# Allegro board i8080.brd
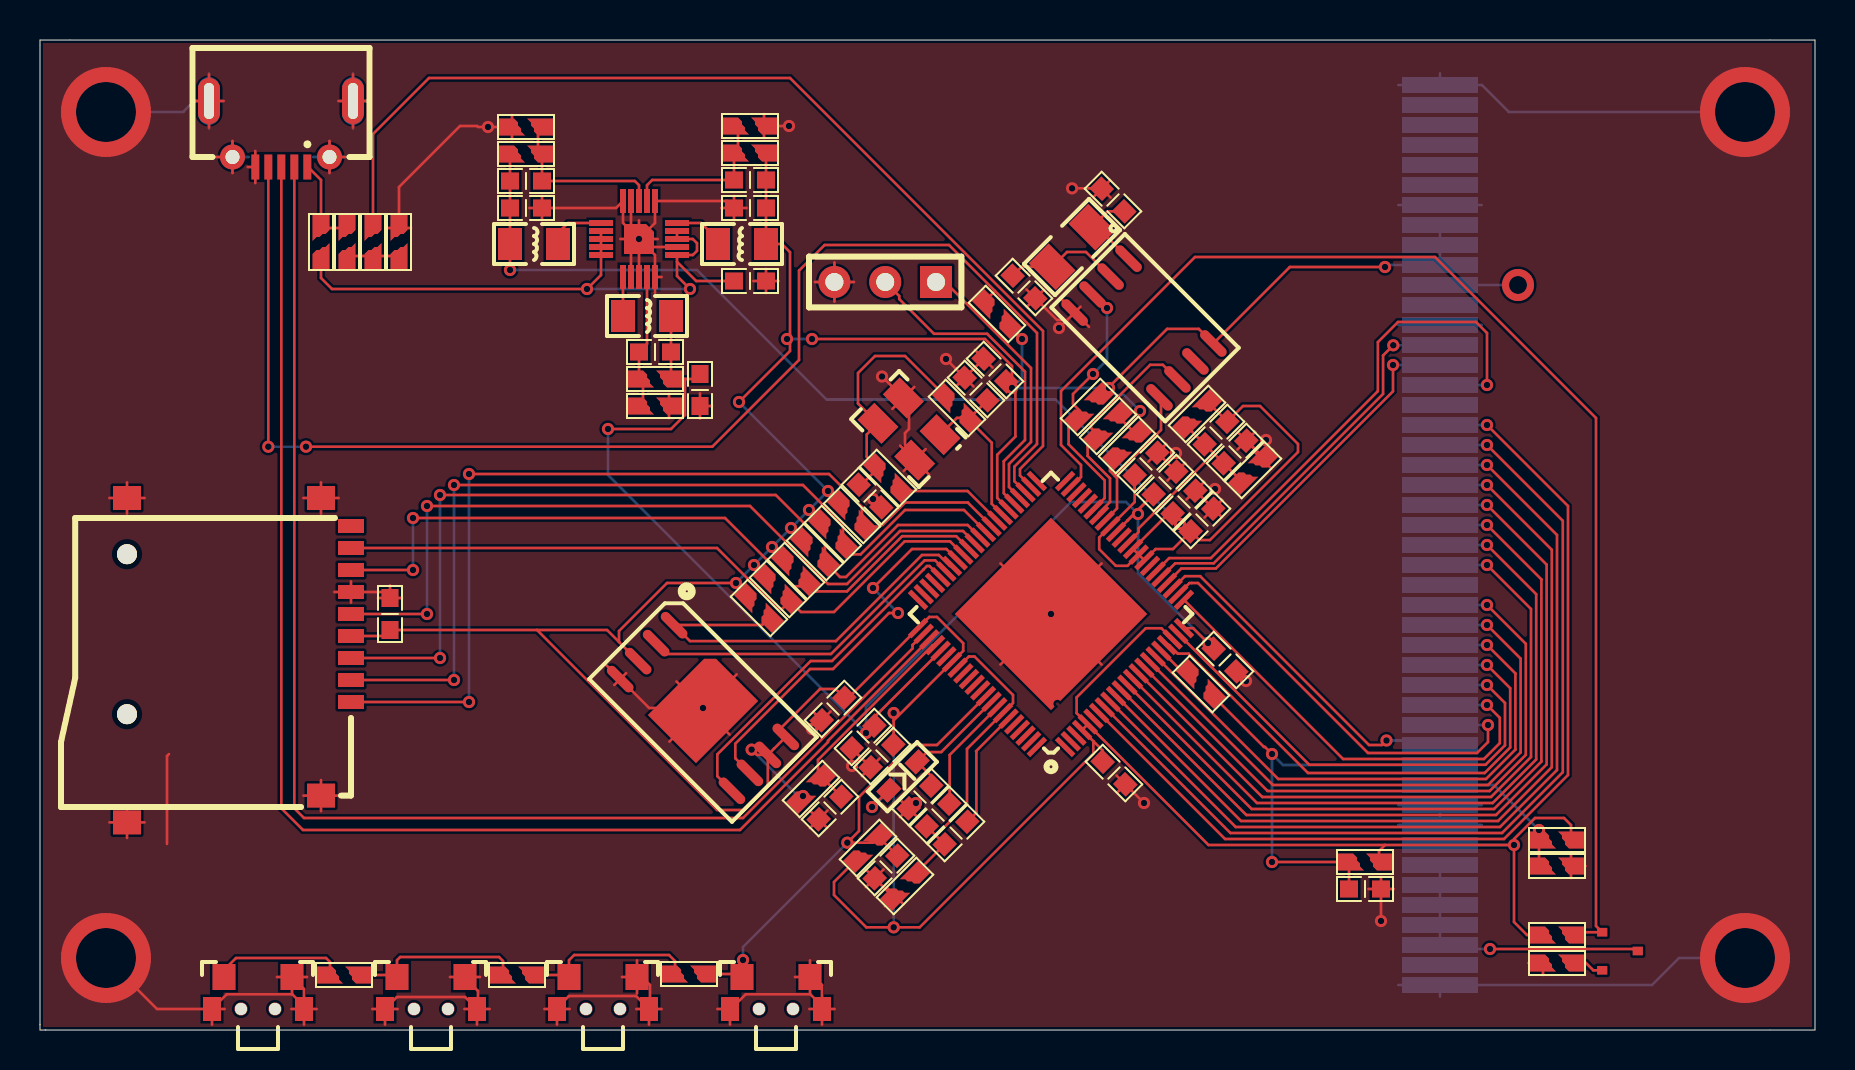
[diagram p0: board, top side]
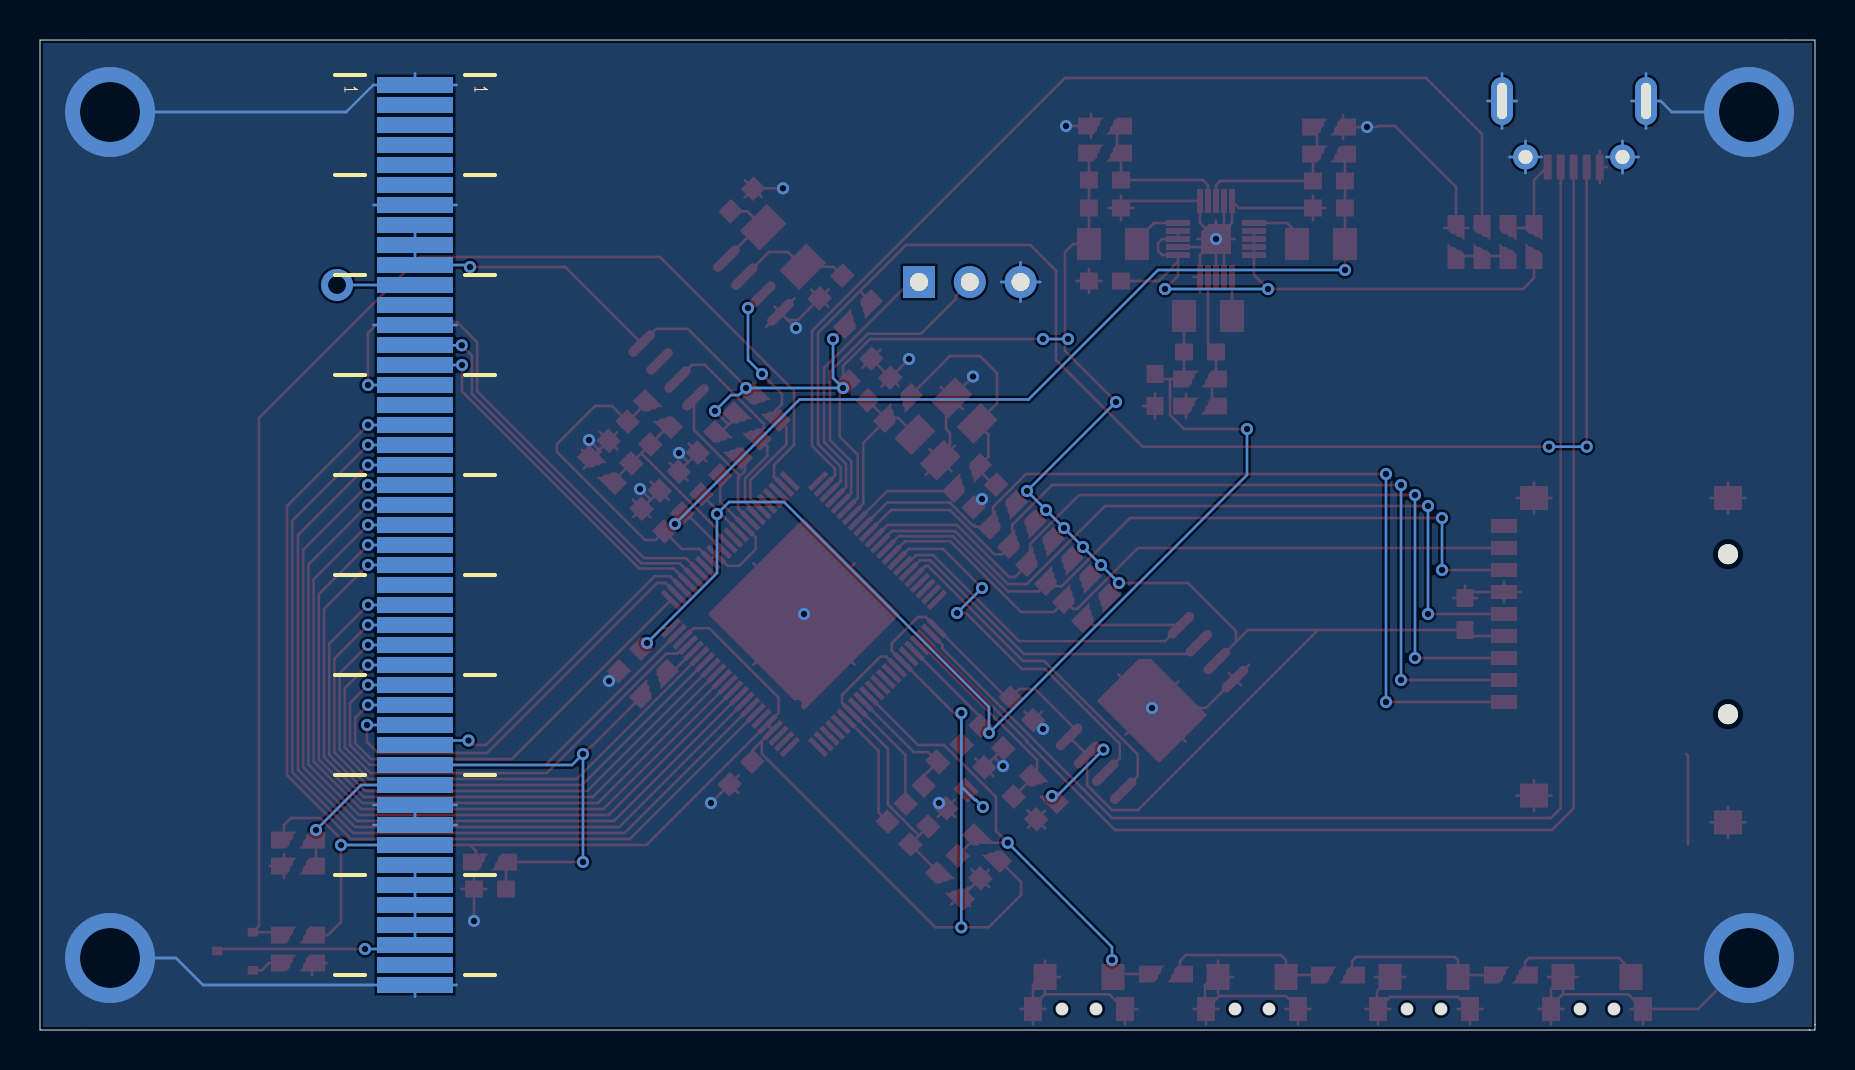
[diagram p1: board, bottom side, seen from below]

Outline 88.75 x 49.5 mm; copper layers: TOP, BOTTOM. Coordinates in mm from the lower left corner of the outline.
Outline path: 0,0.25 0,49.5 88.75,49.5 88.75,0 0.25,0 ; 0,0.3 0,0 0.3,0

## Design rules (mm)
constraint set DEFAULT: min track width 0.13

## Placement (name value [footprint] x y rotation side)
C1  33pF  [CAP0603]  46.8 32.05 315 top
C2  33pF  [CAP0603]  41.5 26.7 135 top
C3  1uF  [CAP0603]  39.5 11.1 225 top
C4  12pF  [CAP0603]  53.65 41.5 315 top
C5  12pF  [CAP0603]  49.2 37.15 135 top
C6  104  [CAP0603]  42.3 8.15 225 top
C7  0.1uF  [CAP0603]  17.5 20.8 90 top
C8  220pF  [CAP0603]  35.5 42.5 0 top
C9  10uF  [CAP0603]  35.5 41.1 0 top
C10  220pF  [CAP0603]  30.75 33.9 180 top
C11  1uF  [CAP0603]  24.3 42.45 0 top
C12  10uF  [CAP0603]  24.3 41.1 0 top
C13  10uF  [CAP0603]  33 32 90 top
C14  0.1uF  [CAP0603]  57.2 26.4 45 top
C15  0.1uF  [CAP0603]  55.3 28.3 45 top
C16  0.1uF  [CAP0603]  58.1 25.5 45 top
C19  0.1uF  [CAP0603]  59.25 18.5 315 top
C20  0.1uF  [CAP0603]  41.15 14.65 225 top
C21  0.1uF  [CAP0603]  56.25 27.35 45 top
C22  0.1uF  [CAP0603]  42.1 13.7 225 top
C23  0.1uF  [CAP0603]  47.75 33 135 top
C24  0.1uF  [CAP0603]  53.7 12.85 315 top
C25  1uF  [CAP0603]  35.5 37.45 180 top
C27  0.1uF  [CAP0603]  39.65 16.05 225 top
C29  0.1uF  [CAP0603]  58.8 29.85 225 top
C30  1uF  [CAP0603]  44.9 10.75 225 top
C31  1uF  [CAP0603]  45.8 9.85 225 top
C32  0.1uF  [CAP0603]  44 11.65 225 top
C33  0.1uF  [CAP0603]  59.75 28.9 45 top
C35  1uF  [CAP0603]  66.25 7.05 0 top
D1  1N4148  [1N4148-SOD323]  43.15 12.7 225 top
J3  -  [TFT8K3548FPC-A1-E]  70 24.75 0 bottom
J4  USB  [MICROUSB]  12.05 43.65 0 top
J5  Debug  [HEADER1X3_2_54]  44.8 37.4 270 top
J6  -  [TF-SOCKET]  15.55 16.4 270 top
L1  1.5uH  [MLF2012]  35.1 39.3 180 top
L2  1.5uH  [MLF2012]  30.35 35.7 0 top
L3  1.5uH  [MLF2012]  24.7 39.3 0 top
NOREF  -  []  0 0 90 top
NOREF#2  -  []  0 49.5 0 top
NOREF#3  -  []  82 49.5 0 top
NOREF#4  -  []  0 0 0 top
Q1  GP2302  [SOT23]  79 3.95 0 top
R1  1M  [RES0603]  45.85 31.1 135 top
R2  0R  [RES0603]  42.4 27.6 135 top
R3  10K  [RES0603]  38.55 12.05 225 top
R4  10K/DNP  [RES0603]  75.85 9.5 180 top
R5  10K  [RES0603]  75.85 8.2 0 top
R6  10K  [RES0603]  75.85 4.75 180 top
R7  22R  [RES0603]  75.85 3.35 0 top
R8  0R  [RES0603]  14.05 39.4 270 top
R9  10K  [RES0603]  47.85 35.8 315 top
R10  10K  [RES0603]  16.65 39.4 90 top
R11  10K  [RES0603]  15.35 39.4 270 top
R12  22K  [RES0603]  17.95 39.4 90 top
R13  10K  [RES0603]  35.95 21.1 135 top
R14  10K  [RES0603]  53.4 30.2 45 top
R15  10K  [RES0603]  54.35 29.25 45 top
R16  100K  [RES0603]  41.4 9.1 45 top
R17  10K  [RES0603]  52.45 31.15 45 top
R18  10K  [RES0603]  32.45 2.8 180 top
R19  10K  [RES0603]  23.85 2.75 180 top
R20  10K  [RES0603]  15.2 2.75 180 top
R21  47K  [RES0603]  40.6 25.75 315 top
R22  47K  [RES0603]  39.65 24.8 315 top
R23  47K  [RES0603]  38.75 23.9 315 top
R24  47K  [RES0603]  37.8 22.95 315 top
R25  47K  [RES0603]  36.9 22.05 315 top
R26  550K  [RES0603]  35.5 43.85 0 top
R27  110K  [RES0603]  35.5 45.2 0 top
R28  47K  [RES0603]  24.3 45.15 180 top
R29  100K  [RES0603]  30.75 31.2 180 top
R30  100K  [RES0603]  30.75 32.55 180 top
R31  152K  [RES0603]  24.3 43.8 0 top
R32  2K  [RES0603]  57.85 30.8 45 top
R35  2K  [RES0603]  60.65 28 225 top
R36  0R  [RES0603]  43.25 7.2 45 top
R37  10K  [RES0603]  66.25 8.4 180 top
R38  0R  [RES0603]  58.05 17.3 135 top
SW2  TS_018-4.55x3.5x1.8  [TS_018-4P55X3P5X1P8]  36.8 1.05 270 top
SW3  TS_018-4.55x3.5x1.8  [TS_018-4P55X3P5X1P8]  28.15 1.05 270 top
SW4  TS_018-4.55x3.5x1.8  [TS_018-4P55X3P5X1P8]  19.55 1.05 270 top
SW5  TS_018-4.55x3.5x1.8  [TS_018-4P55X3P5X1P8]  10.9 1.05 270 top
U1  F1C100S  [F1C100S-MQFN]  50.55 20.8 135 top
U2  GD5FxG4UAYIG  [GD5F1GQ4X_W25QXX_SOP8_208MIL]  33.15 16.1 315 top
U3  PCF8563  [PCF8563-SO8-3]  55.2 35.1 315 top
U4  EA3036  [EA3036-QFN20]  29.95 39.55 270 top
Y1  YSX321SL  [YSX321SL-3_2X2_5X0_8]  43.45 30.05 135 top
Y2  32.768KHz  [CRYSTAL-3215]  51.6 39.15 45 top

## Library data of the parts
C1-C16 C19-C25 C27 C29-C33 C35 = CAPACITOR NON-POL
D1 = DIODE
J3 = TFT8K3548FPC_A1_E
J4 = MICROUSB
J5 = HEADER 3
J6 = TF-SOCKET
L1-L3 = INDUCTOR/SM
Q1 = GP2302
R1-R3 R6 R7 R9 R13-R32 R35-R37 = RESISTOR/SM
R4 R5 R8 R10-R12 R38 = RESISTOR
SW2-SW5 = TS_018-4.55x3.5x1.8
U1 = F1C100S
U2 = GD5FxG4UAYIG
U3 = PCF8563-SOP8
U4 = ea3036
Y1 = YSX321SL
Y2 = CRYSTAL/SM

## Footprints (pads in the part's own frame, mm; a bottom-side part is the same pattern mirrored in y, then rotated)
1N4148-SOD323
  custom 1x0.8 smd: 1(-1,0) 2(1,0)
CAP0603
  custom 0.9x0.85 smd: 1(-0.8,0) 2(0.8,0)
CRYSTAL-3215
  custom 1.4x1.9 smd: 1(-1.4,0) 2(1.4,0)
EA3036-QFN20
  custom 1.2x0.3 smd: 1(-1.9,0.8) 2(-1.9,0.4) 3(-1.9,0) 4(-1.9,-0.4) 5(-1.9,-0.8) 11(1.9,-0.8) 12(1.9,-0.4) 13(1.9,0) 14(1.9,0.4) 15(1.9,0.8)
  custom 0.3x1.2 smd: 6(-0.8,-1.9) 7(-0.4,-1.9) 8(0,-1.9) 9(0.4,-1.9) 10(0.8,-1.9) 16(0.8,1.9) 17(0.4,1.9) 18(0,1.9) 19(-0.4,1.9) 20(-0.8,1.9)
  custom 1.5x1.5 smd: 21(0,0)
F1C100S-MQFN
  custom 1.2x0.25 smd: 1(-5.2,4.2) 2(-5.2,3.8) 3(-5.2,3.4) 4(-5.2,3) 5(-5.2,2.6) 6(-5.2,2.2) 7(-5.2,1.8) 8(-5.2,1.4) 9(-5.2,1) 10(-5.2,0.6) 11(-5.2,0.2) 12(-5.2,-0.2) 13(-5.2,-0.6) 14(-5.2,-1) 15(-5.2,-1.4) 16(-5.2,-1.8) 17(-5.2,-2.2) 18(-5.2,-2.6) 19(-5.2,-3) 20(-5.2,-3.4) 21(-5.2,-3.8) 22(-5.2,-4.2) 45(5.2,-4.2) 46(5.2,-3.8) 47(5.2,-3.4) 48(5.2,-3) 49(5.2,-2.6) 50(5.2,-2.2) 51(5.2,-1.8) 52(5.2,-1.4) 53(5.2,-1) 54(5.2,-0.6) 55(5.2,-0.2) 56(5.2,0.2) 57(5.2,0.6) 58(5.2,1) 59(5.2,1.4) 60(5.2,1.8) 61(5.2,2.2) 62(5.2,2.6) 63(5.2,3) 64(5.2,3.4) 65(5.2,3.8) 66(5.2,4.2)
  custom 0.25x1.2 smd: 23(-4.2,-5.2) 24(-3.8,-5.2) 25(-3.4,-5.2) 26(-3,-5.2) 27(-2.6,-5.2) 28(-2.2,-5.2) 29(-1.8,-5.2) 30(-1.4,-5.2) 31(-1,-5.2) 32(-0.6,-5.2) 33(-0.2,-5.2) 34(0.2,-5.2) 35(0.6,-5.2) 36(1,-5.2) 37(1.4,-5.2) 38(1.8,-5.2) 39(2.2,-5.2) 40(2.6,-5.2) 41(3,-5.2) 42(3.4,-5.2) 43(3.8,-5.2) 44(4.2,-5.2) 67(4.2,5.2) 68(3.8,5.2) 69(3.4,5.2) 70(3,5.2) 71(2.6,5.2) 72(2.2,5.2) 73(1.8,5.2) 74(1.4,5.2) 75(1,5.2) 76(0.6,5.2) 77(0.2,5.2) 78(-0.2,5.2) 79(-0.6,5.2) 80(-1,5.2) 81(-1.4,5.2) 82(-1.8,5.2) 83(-2.2,5.2) 84(-2.6,5.2) 85(-3,5.2) 86(-3.4,5.2) 87(-3.8,5.2) 88(-4.2,5.2)
  custom 6.8x6.8 smd: 89(0,0)
GD5F1GQ4X_W25QXX_SOP8_208MIL
  custom 1.68x0.48 smd: 1(-3.95,1.905) 2(-3.95,0.635) 3(-3.95,-0.635) 4(-3.95,-1.905) 5(3.95,-1.905) 6(3.95,-0.635) 7(3.95,0.635) 8(3.95,1.905)
  custom 3.4x4.4 smd: 9(0,0)
HEADER1X3_2_54
  rect 1.6x1.6 hole 0.9: 1(0,0)
  round 1.6 hole 0.9: 2(0,-2.54) 3(0,-5.08)
MICROUSB
  rect 0.4x1.25 smd: 1(1.315,-0.5) 2(0.665,-0.5) 3(0.015,-0.5) 4(-0.635,-0.5) 5(-1.285,-0.5)
  round 1.25 hole 0.7: 6(-2.425,0) 7(2.425,0)
  oval 1.1x2.3 hole 0.5x1.8: 8(-3.6,2.8) 9(3.6,2.8)
MLF2012
  custom 1.2x1.6 smd: 1(-1.2,0) 2(1.2,0)
PCF8563-SO8-3
  custom 1.68x0.48 smd: 1(-3,1.905) 2(-3,0.635) 3(-3,-0.635) 4(-3,-1.905) 5(3,-1.905) 6(3,-0.635) 7(3,0.635) 8(3,1.905)
RES0603
  custom 1.3x0.85 smd: 1(-0.7,0) 2(0.7,0)
SOT23
  rect 0.508x0.432 smd: 1(-0.889,0.94) 2(-0.889,-0.965) 3(0.889,0)
TF-SOCKET
  round 1 hole 1.1 unplated: (-7.39,-11.2) (0.61,-11.2)
  rect 0.7x1.3 smd: 1(0,0) 2(-1.1,0) 3(-2.2,0) 4(-3.3,0) 5(-4.4,0) 6(-5.5,0) 7(-6.6,0) 8(-7.7,0) 9(-8.8,0)
  rect 1.2x1.4 smd: 10(-10.2,-1.5) 11(4.68,-1.5) 12(-10.2,-11.2) 13(6.02,-11.2)
TFT8K3548FPC-A1-E
  custom 3.8x0.8 smd: 1(0,-22.5) 2(0,-21.5) 3(0,-20.5) 4(0,-19.5) 5(0,-18.5) 6(0,-17.5) 7(0,-16.5) 8(0,-15.5) 9(0,-14.5) 10(0,-13.5) 11(0,-12.5) 12(0,-11.5) 13(0,-10.5) 14(0,-9.5) 15(0,-8.5) 16(0,-7.5) 17(0,-6.5) 18(0,-5.5) 19(0,-4.5) 20(0,-3.5) 21(0,-2.5) 22(0,-1.5) 23(0,-0.5) 24(0,0.5) 25(0,1.5) 26(0,2.5) 27(0,3.5) 28(0,4.5) 29(0,5.5) 30(0,6.5) 31(0,7.5) 32(0,8.5) 33(0,9.5) 34(0,10.5) 35(0,11.5) 36(0,12.5) 37(0,13.5) 38(0,14.5) 39(0,15.5) 40(0,16.5) 41(0,17.5) 42(0,18.5) 43(0,19.5) 44(0,20.5) 45(0,21.5) 46(0,22.5)
TS_018-4P55X3P5X1P8
  round 0.65 hole 0.6: (0,0.85) (0,-0.85)
  custom 1.2x0.9 smd: 1(0,2.3) 2(0,-2.3)
  custom 1.3x1.15 smd: 3(-1.6,1.7) 4(-1.6,-1.7)
YSX321SL-3_2X2_5X0_8
  custom 1.7x1.2 smd: 1(-1.3,-0.9) 2(1.3,-0.9) 3(1.3,0.9) 4(-1.3,0.9)

## Nets
1V2: C10.1 C13.2 C19.1 C20.1 C21.1 L2.2 R30.1 U1.22 U1.35 U1.71
2V5: C11.1 C12.1 C14.1 C15.1 C16.1 C29.1 L3.1 R31.1 R32.2 U1.30 U1.31 U1.32 U1.34 U1.36
3V3: C7.1 C8.2 C9.2 C22.1 C23.1 C24.1 C27.1 D1.2 J3.8 J3.9 J3.10 J3.39 J6.4(VDD) L1.1 R3.2 R4.1 R6.2 R9.2 R13.2 R14.2 R15.2 R16.1 R17.2 R21.1 R22.1 R23.1 R24.1 R25.1 R26.2 R37.1 U1.4 U1.5 U1.20 U1.50 U1.67 U1.73 U2.3(W\P\/IO2) U2.7 U2.8 U3.8
5V: C25.2 R8.2 U4.7 U4.8 U4.9 U4.10 U4.16 U4.18 U4.19(VIN3)
AGND: C30.2 C31.2 R36.2 U1.74 U1.82
AVCC: C32.1 D1.1(K) U1.80
GND: C1.1 C2.1 C3.2 C4.1 C5.1 C6.2 C7.2 C9.1 C12.2 C13.1 C14.2 C15.2 C16.2 C19.2 C20.2 C21.2 C22.2 C23.2 C24.2 C25.1 C27.2 C32.2 C33.2 C35.2 J3.1 J3.7 J3.13 J3.37 J3.38 J3.46 J4.5 J4.6 J4.7 J4.8 J4.9 J5.3 J6.6 J6.10 J6.11 J6.12 J6.13 R5.2 R7.1 R12.2 R27.2 R28.2 R29.1 R35.1 R36.1 SW2.1 SW2.2 SW2.3 SW3.1 SW3.2 SW3.3 SW4.1 SW4.2 SW4.3 SW5.1 SW5.2 SW5.3 U1.89 U2.4 U2.9 U3.4(VSS) U4.1 U4.4 U4.5 U4.12 U4.13 U4.15 U4.17 U4.21 Y1.2 Y1.4
VBUS: J4.1(VBUS) R8.1 R11.1
BL: Q1.1 R6.1 U1.43
BS0: J3.36 R4.2 R5.1
D3: J3.18 U1.7
D4: J3.19 U1.8
D5: J3.20 U1.9
D6: J3.21 U1.10
D7: J3.22 U1.11
D10: J3.23 U1.12
D11: J3.24 U1.13
D12: J3.25 U1.14
D13: J3.27 U1.15
D14: J3.28 U1.16
D15: J3.29 U1.17
D19: J3.30 U1.19
D20: J3.31 U1.21
D21: J3.32 U1.23
D22: J3.33 U1.24
D23: J3.34 U1.25
DE: J3.14 U1.27
HPCOM: U1.3
HPCOMFB: U1.2
HPL: U1.1
HPR: U1.88
HSYNC: J3.16 U1.28
LCD_CLK: J3.15 U1.26
LED-: J3.40 J3.41 J3.42 J3.43 J3.44 Q1.3
LINE_IN: U1.86
LRADC: C6.1 R16.2 R18.1 SW2.4 U1.79
MIC_IN: U1.87
NRESET: C35.1 J3.35 R37.2 R38.1
OSCI: C1.2 R1.1 U1.51 Y1.1
OSCO: R2.1 U1.52
PD0: U1.6
PD12: R38.2 U1.18
PE4: U1.45
PE5: U1.44
PE7: U1.42
PE8: U1.41
PE9: U1.40
RESET: C3.1 R3.1 U1.70
RTC_INT: R17.1 U1.39 U3.3
RTC_OSCI: C4.2 U3.1 Y2.2
RTC_OSCO: C5.2 U3.2 Y2.1
SDC0_CLK: J6.5 U1.56
SDC0_CMD: J6.3 R23.2 U1.55
SDC0_D0: J6.7 R24.2 U1.57
SDC0_D1: J6.8 R25.2 U1.58
SDC0_D2: J6.1 R21.2 U1.53
SDC0_D3: J6.2 R22.2 U1.54
SF_CLK: U1.59 U2.6
SF_CS: R13.1 U1.60 U2.1
SF_MISO: U1.61 U2.2
SF_MOSI: U1.62 U2.5
SVREF: C29.2 C33.1 R32.1 R35.2 U1.33
TE: J3.11
TWI0_SCK: R14.1 U1.38 U3.6
TWI0_SDA: R15.1 U1.37 U3.5
UART0_RX: J5.2 U1.49
UART0_TX: J5.1 U1.48
USB_DET: R10.2 U1.46
USB_DM: J4.2 U1.68
USB_DP: J4.3 U1.69
USB_ID: J4.4 R9.1 U1.47
VRA1: C30.1 U1.81
VRA2: C31.1 U1.83(VRA2)
VSYNC: U1.29
X1: U1.66
X2: U1.65
Y1: U1.64
Y2: U1.63
N101915: C8.1 R26.1 R27.1 U4.2
N101919: C11.2 R28.1 R31.2 U4.3
N101966: C10.2 R29.2 R30.2 U4.14
N131139: L3.2 U4.6
N132697: L1.2 U4.20
N136168: L2.1 U4.11
N235998: R18.2 R19.1 SW3.4
N236006: R19.2 R20.1 SW4.4
N236014: R20.2 SW5.4
N256100: C2.2 R1.2 R2.2 Y1.3(XOUT)
N15766837: R10.1 R11.2 R12.1
N15767318: Q1.2(SOURCE) R7.2

Pads without a net: J3 2 3 4 5 6 12 17 26 45; J6 9; U1 72 75 76 77 78 84 85; U3 7

## Via types
v1: diameter 0.61, hole 0.33, TOP to BOTTOM, 88 vias
v2: diameter 1.6, hole 0.9, TOP to BOTTOM, 1 via
v3: diameter 4.5, hole 3, TOP to BOTTOM, 4 vias

## Routing (per net, layer and track width the routed paths; a pad name or vN(x,y) marks a point on that pad's centre or on a via; arc(x,y) is an arc through that point)
1V2: length 70.3
  TOP w0.13: 32.25,32.55 32.75,32.55 C13.2 ; 32.25,32.55 R30.1 31.55,32.65 C10.1 L2.2 ; 32.25,32.55 32.25,30.75 31.55,30.05 v1(28.4,30.05) ; v1(41.3,14.85) 41.35,14.85 C20.1 41.72,15.64 U1.71 ; 54.36,25.46 54.8,25.9 ; 54.36,25.46 55.23,26.33 55.23,26.33 ; 54.36,25.46 U1.35 ; 54.8,25.9 55.23,26.33 ; 54.8,25.9 v1(54.9,25.8) ; 55.23,26.33 C21.1 ; U1.22 57.66,20.09 v1(58.4,19.35) C19.1
  BOTTOM w0.13: v1(58.4,19.35) 54.9,22.85 v1(54.9,25.8) 54.3,26.4 51.55,26.4 41.3,16.15 v1(41.3,14.85) 28.4,27.75 v1(28.4,30.05)
2V5: length 73.2
  TOP w0.13: U1.31 55.22,23.49 55.78,24.05 56.65,24.05 C16.1 ; U1.31 U1.32 56.43,25.83 C14.1 57.08,25.38 ; U1.31 54.37,23.21 53.79,23.21 52.96,24.04 52.96,24.62 U1.36 54.73,26.4 C15.1 ; 57.08,25.38 v1(57,25.3) ; 57.08,25.38 C16.1 ; C16.1 57.97,24.5 58.5,24.5 62.9,28.9 62.9,29.3 61,31.2 60.15,31.2 C29.1 58.49,31.3 R32.2 ; v1(23.5,38) L3.1 C12.1 C11.1 23.5,43.7 R31.1
  BOTTOM w0.13: v1(57,25.3) 50.77,31.52 39.33,31.52 32.85,38 v1(23.5,38)
3V3: length 237.4
  TOP w0.13: U2.7 36.7,14.06 U2.8 37.29,14.66 37.04,14.91 37.04,15.09 39,17.05 39.78,17.05 C27.1 40.43,16.62 U1.67 44.46,20.65 44.85,20.65 46.16,19.34 46.16,18.96 U1.73 42.68,15.48 ; U2.7 36.39,12.24 35.15,11 33.85,11 24.85,20 ; U2.7 35.84,13.76 v1(35.58,14.02) ; C22.1 42.68,14.28 42.68,15.48 ; 67.25,9.25 66.95,8.95 R37.1 ; 67.25,9.25 58.42,9.25 U1.5 ; 67.25,9.25 v1(73.7,9.25) ; 42.68,15.48 v1(42.68,15.85) ; 37.5,34.65 37.5,33.95 v1(34.95,31.4) ; 37.5,34.65 37.4,34.55 v1(37.35,34.55) ; 37.5,34.65 37.5,38.89 37.09,39.3 L1.1 C9.2 C8.2 36.3,43.75 R26.2 ; 53.4,32.1 52.95,31.64 ; 53.4,32.1 56.36,35.06 57.94,35.06 U3.8 62.49,38.15 v1(67.25,38.15) ; 53.4,32.1 v1(53.45,32.1) ; R9.2 v1(49.1,34.55) ; U1.5 U1.4 52.67,14.44 ; U1.5 51.83,15.84 51.83,16.63 55.29,20.09 56.07,20.09 U1.20 ; v1(37.55,25.1) R23.1 ; 24.85,20 28.35,20 28.95,19.4 ; 24.85,20 C7.1 17.2,19.7 J6.4 ; v1(38.6,34.55) 47.25,34.55 48.6,33.2 v1(48.6,32.1) 48.32,32.38 C23.1 48.77,31.98 48.77,29.67 47.86,28.76 47.86,26.6 U1.50 ; 52.67,14.44 53.13,13.97 C24.1 ; 52.67,14.44 52.67,13.82 43.98,5.13 v1(42.68,5.13) 41.32,5.13 39.7,6.75 39.7,7.4 40.91,8.61 ; v1(73.7,9.25) 73.7,9.55 74.75,10.6 76.2,10.6 76.55,10.25 R4.1 ; v1(73.7,9.25) 73.7,5.4 74.35,4.75 R6.2 ; 54.3,30.3 53.89,30.7 ; 54.3,30.3 54.34,30.3 v1(55,30.95) ; 54.3,30.3 54.84,29.75 ; 40.1,26.25 v1(39.4,26.95) ; 28.95,19.4 U2.3 ; 28.95,19.4 28.95,19.95 31.35,22.35 v1(34.8,22.35) 34.8,22.25 R13.2 ; v1(38.45,26) R22.1 ; v1(36.6,24.15) 37.3,23.45 ; v1(35.7,23.25) 36.41,22.55 ; D1.2 v1(41.6,11.15)
  BOTTOM w0.13: 42.68,12.18 42.01,11.5 41.95,11.5 v1(41.6,11.15) ; 42.68,12.18 v1(42.68,5.13) ; 42.68,12.18 v1(42.68,15.85) ; v1(67.25,38.15) 67.35,38.25 J3.10 J3.9 J3.8 ; v1(35.58,14.02) 37.9,11.7 v1(38.15,11.7) ; v1(55,30.95) 54.2,31.75 53.8,31.75 v1(53.45,32.1) v1(48.6,32.1) 49.1,32.6 v1(49.1,34.55) ; v1(34.8,22.35) v1(35.7,23.25) v1(36.6,24.15) v1(37.55,25.1) v1(38.45,26) v1(39.4,26.95) v1(34.95,31.4) ; J3.39 v1(73.7,9.25) ; v1(38.6,34.55) v1(37.35,34.55)
5V: length 31.1
  TOP w0.13: U4.7 U4.8 U4.9 U4.10 28.05,37.75 v1(27.35,37.05) 14.6,37.05 14.05,37.6 R8.2 ; C25.2 32.81,37.45 31.85,38.41 ; 31.85,38.41 31.85,37.7 v1(32.5,37.05) ; 31.85,38.41 U4.16 32.64,38.75 32.85,38.96 32.85,39.34 32.64,39.55 U4.18 U4.19
  BOTTOM w0.13: v1(27.35,37.05) v1(32.5,37.05)
AGND: length 15.9
  TOP w0.13: R36.2 43.74,7.8 C31.2 44.78,9.74 ; 44.78,9.74 C30.2 ; 44.78,9.74 44.81,9.74 46.35,11.28 46.35,14.05 U1.82 48.15,15.85 48.65,16.35 48.65,16.75 46.73,18.67 46.44,18.67 45.88,18.11
AVCC: length 6.5
  TOP w0.13: U1.80 45.06,13.9 44.35,13.9 D1.1 44.57,12.7 C32.1
GND: length 326.2
  TOP w0.13: 23.6,44.55 R28.2 ; R28.2 v1(22.4,45.15) 21.9,45.15 21.85,45.2 21,45.2 17.95,42.15 R12.2 ; R28.2 23.6,45.75 ; C16.2 58.22,26.52 ; C16.2 59.09,25.64 ; C16.2 59.11,26.51 ; C16.2 58.22,25.62 ; 58.22,26.52 C14.2 ; 58.22,26.52 v1(58.75,27.05) ; 59.87,29.02 C33.2 ; C33.2 59.89,29.89 ; C33.2 60.74,29.04 ; C33.2 60.33,29.47 60.8,29 ; C33.2 60.76,29.91 ; 29.82,1.05 SW3.1 ; SW3.1 31.08,1.05 ; SW3.1 30.5,1.1 30.5,2.25 30.1,2.65 SW3.3 ; SW3.1 30.45,0.27 ; SW3.1 29.8,1.7 26.45,1.7 25.85,1.1 SW3.2 ; SW3.3 29.85,3.48 ; SW3.3 29.1,2.65 ; SW3.3 29.85,1.82 ; v1(38.6,15.05) 39.03,15.48 C27.2 ; Y1.4 44.46,27.77 ; Y1.4 43.73,28.77 43.25,29.25 43.25,29.85 43.45,30.05 43.45,31.32 Y1.2 ; Y1.4 44.28,29.04 ; Y1.4 43.18,27.94 ; Y1.4 43.01,29.22 ; 31.82,17.43 v1(33.15,16.1) ; v1(33.15,16.1) 34.83,17.78 ; v1(33.15,16.1) 30.46,16.1 U2.4 ; v1(33.15,16.1) 31.47,14.42 ; v1(33.15,16.1) 34.48,14.77 ; 21.85,0.27 SW4.1 ; SW4.1 21.22,1.05 ; SW4.1 21.25,1.65 17.85,1.65 SW4.2 ; SW4.1 21.9,1.1 21.9,1.95 21.25,2.6 SW4.3 ; SW4.1 22.48,1.05 ; 48.02,18.27 v1(50.55,20.8) ; v1(50.55,20.8) 53.08,23.33 ; v1(50.55,20.8) 48.02,23.33 ; v1(50.55,20.8) 53.08,18.27 ; R36.1 42.61,6.7 C6.2 ; R36.1 42.33,7.13 ; R36.1 42.24,6.19 ; R36.1 43.18,6.28 ; 34.07,41.1 C9.1 ; C9.1 34.35,41.45 U4.1 30.75,40.35 v1(29.95,39.55) ; C9.1 34.7,40.5 ; C9.1 34.7,41.7 ; C9.1 35.33,41.1 ; 42.99,10.64 C32.2 ; C32.2 43.53,11.08 v1(43.8,11.35) ; C32.2 43.01,11.51 ; C32.2 43.86,10.66 ; 38.66,15.91 C27.2 ; C27.2 38.64,15.04 ; C27.2 39.53,15.93 ; 8.82,43.65 J4.6 ; J4.6 9.62,44.45 ; J4.6 9.62,42.85 ; SW2.2 34.55,1.05 35.29,1.79 38.51,1.79 39.1,1.2 ; SW2.2 34.5,0.27 ; SW2.2 33.87,1.05 ; 40.98,13.68 40.98,13.58 v1(40.6,13.2) ; 40.98,13.68 C20.2 ; 40.98,13.68 C22.2 ; U2.4 29.31,17.84 ; U2.4 28.29,18.27 ; U2.4 28.71,17.25 ; 51.35,35.5 51.36,35.5 U3.4 ; 51.35,35.5 50.85,35.5 C5.1 ; 51.35,35.5 v1(50.95,35.1) ; 14.05,10.94 J6.11 ; J6.11 14.93,11.72 ; J6.11 13.17,11.72 ; J6.11 14.05,12.5 ; C14.2 58.21,27.41 ; C14.2 57.32,26.52 ; 25.85,0.27 SW3.2 ; SW3.2 26.48,1.05 ; SW3.2 25.22,1.05 ; 35.67,37.45 C25.1 ; C25.1 36.3,36.85 ; C25.1 36.93,37.45 ; C25.1 36.3,38.05 ; SW5.3 13.35,2.65 ; SW5.3 13.2,2.05 13.2,1.2 ; SW5.3 12.6,1.82 ; SW5.3 11.85,2.65 ; 20.5,2.65 SW4.3 ; SW4.3 22,2.65 ; C5.1 50.19,37.01 ; C5.1 49.34,36.16 ; C5.1 49.32,37.03 ; 56.34,28.39 C21.2 ; 56.34,28.39 C15.2 ; 56.34,28.39 v1(56.8,28.85) ; C21.2 56.37,27.47 ; C21.2 57.26,28.36 ; C23.2 C1.1 ; C23.2 47.63,33.12 ; C23.2 46.74,34.01 ; C1.1 v1(45.3,33.55) ; C1.1 45.81,32.19 ; C1.1 46.68,32.17 ; 33,30.57 C13.1 ; C13.1 33,31.83 ; C13.1 33.6,31.2 ; J6.13 4.35,11.16 ; J6.13 3.47,10.38 ; J6.13 5.23,10.38 ; J6.13 4.35,9.6 ; C12.2 25.1,41.7 ; C12.2 25.1,40.5 ; C12.2 28.8,41.1 U4.5 29.15,40.35 29.55,39.95 ; C12.2 24.47,41.1 ; C2.1 v1(41.65,26.55) ; 37.75,2.65 SW2.3 ; SW2.3 38.5,3.48 ; SW2.3 38.5,1.82 ; SW2.3 38.7,2.65 39.1,2.25 39.1,1.2 ; 30.75,36.87 U4.15 ; U4.15 31.08,37.65 ; U4.15 30.75,38.75 30.35,39.15 ; 31.45,31.8 R29.1 31.45,30.6 ; 8.45,45.12 J4.8 ; J4.8 7.72,46.45 ; J4.8 8.45,47.78 ; J4.8 9.18,46.45 ; C24.2 v1(55.2,11.35) ; C24.2 53.82,12.73 ; C24.2 53.84,11.86 ; U4.4 29.55,39.95 ; 29.55,39.95 v1(29.95,39.55) ; J4.7 14.48,44.45 ; J4.7 14.48,42.85 ; J4.7 15.28,43.65 ; 15.65,45.12 J4.9 ; J4.9 15.65,47.78 ; J4.9 16.38,46.45 ; J4.9 14.92,46.45 ; SW5.1 13.83,1.05 ; SW5.1 13.2,1.2 ; SW5.1 13.2,0.27 ; SW5.1 12.57,1.05 ; C35.2 v1(67.05,5.45) ; C35.2 67.68,7.05 ; C35.2 66.42,7.05 ; C35.2 67.05,7.65 ; 16.9,21.6 C7.2 ; C7.2 17.2,21.9 J6.6 ; C7.2 17.5,22.23 ; C7.2 18.1,21.6 ; SW4.2 17.25,0.27 ; SW4.2 17.88,1.05 ; SW4.2 16.62,1.05 ; 38.49,10.09 C3.2 ; C3.2 39.38,10.98 ; C3.2 39.36,10.11 ; C3.2 38.51,10.96 ; 15.55,21.37 J6.6 ; J6.6 14.72,21.9 ; J6.6 15.55,22.43 ; 51.01,36.59 U3.4 ; U3.4 52.03,36.17 ; U3.4 52.45,35.15 ; 55.42,28.42 C15.2 ; C15.2 56.31,29.31 ; 13.2,1.2 12.61,1.79 9.34,1.79 SW5.2 ; v1(29.95,39.55) 29.55,39.15 U4.12 ; v1(29.95,39.55) 29.02,39.55 ; v1(29.95,39.55) 29.95,40.48 ; v1(29.95,39.55) U4.13 ; v1(29.95,39.55) 30.35,39.15 ; v1(29.95,39.55) 30.88,39.55 ; R35.1 61.66,29.01 ; R35.1 61.14,28.66 60.8,29 ; R35.1 60.72,28.92 ; R35.1 61.57,28.07 ; 38.47,1.05 SW2.1 ; SW2.1 39.1,1.2 ; SW2.1 39.73,1.05 ; SW2.1 39.1,0.27 ; Y1.2 v1(42.1,32.67) ; Y1.2 43.72,32.16 ; Y1.2 42.62,31.06 ; SW5.2 8.6,0.27 ; SW5.2 5.85,1.05 v3(3.3,3.6) ; SW5.2 9.23,1.05 ; 3.47,26.6 J6.12 ; J6.12 4.35,27.38 ; J6.12 5.23,26.6 ; J6.12 4.35,25.82 ; C4.1 53.07,42.08 v1(51.6,42.08) ; C4.1 53.51,42.49 ; C4.1 53.53,41.62 ; C4.1 52.66,41.64 ; 41.29,7.14 C6.2 ; C6.2 42.18,8.03 ; C6.2 41.31,8.01 ; 13.17,26.6 J6.10 ; J6.10 14.93,26.6 ; J6.10 14.05,25.82 ; J6.10 14.05,27.38 ; C22.2 41.09,12.69 ; C22.2 41.98,13.58 ; 60.8,29 v1(61.3,29.5) ; J5.3 39.72,38.38 ; J5.3 38.74,37.4 ; J5.3 39.72,36.42 ; J5.3 40.7,37.4 ; 76.55,7.6 R5.2 ; R5.2 77.28,8.2 ; R5.2 76.55,8.8 ; 17.35,40.1 R12.2 ; R12.2 18.55,40.1 ; 36.2,44.6 R27.2 ; R27.2 v1(37.45,45.2) ; R27.2 36.2,45.8 ; 30.35,39.15 U4.17 ; 10.77,42.35 J4.5 ; J4.5 10.77,43.95 ; J4.5 10.39,43.15 ; 75.15,2.75 R7.1 74.42,3.35 ; C19.2 v1(60.3,17.45) ; 6.35,9.3 6.35,13.7 6.45,13.8
  BOTTOM w0.13: J4.6 9.62,44.45 ; J4.6 10.43,43.65 ; J4.6 8.82,43.65 ; J4.6 9.62,42.85 ; 14.48,42.85 J4.7 ; J4.7 15.28,43.65 ; J4.7 14.48,44.45 ; J4.7 13.67,43.65 ; J4.8 9.18,46.45 ; J4.8 7.71,46.45 7.16,45.9 v3(3.3,45.9) ; J4.8 8.45,45.07 ; J4.8 8.45,47.83 ; 67.92,10.25 J3.38 ; J3.38 72.08,10.25 ; J3.38 J3.37 ; 72.08,35.25 J3.13 67.92,35.25 ; 72.08,41.25 J3.7 67.92,41.25 ; J3.37 72.08,11.25 ; J3.37 67.92,11.25 ; 38.74,37.4 J5.3 ; J5.3 40.7,37.4 ; J5.3 39.72,38.38 ; J5.3 39.72,36.42 ; 70,1.67 J3.46 ; J3.46 80.6,2.25 81.95,3.6 v3(85.25,3.6) ; J3.46 67.92,2.25 ; J4.9 16.38,46.45 ; J4.9 14.92,46.45 ; J4.9 15.65,47.83 ; J4.9 15.65,45.07 ; J3.1 70,47.83 ; J3.1 72.09,47.25 73.44,45.9 v3(85.25,45.9) ; J3.1 67.92,47.25
VBUS: length 4.7
  TOP w0.13: R11.1 R8.1 14.05,42.5 13.4,43.15 13.36,43.15
BL: length 65.7
  TOP w0.13: R6.1 76.69,4.89 Q1.1 77.8,5.2 77.8,30.6 69.75,38.65 57.75,38.65 51.05,31.95 51.05,29.25 52.05,28.25 52.05,27.65 51.56,27.16 U1.43
BS0: length 7.8
  TOP w0.13: v1(74.95,10) 74.95,8.4 R5.1
  BOTTOM w0.13: J3.36 72.7,12.25 v1(74.95,10)
D3: length 48.9
  TOP w0.13: v1(72.35,30.25) 76.4,26.2 76.4,12.75 73.2,9.55 59.25,9.55 U1.7
  BOTTOM w0.13: v1(72.35,30.25) J3.18
D4: length 47
  TOP w0.13: 53.24,16.13 59.52,9.85 73.1,9.85 76.14,12.89 76.14,25.46 v1(72.35,29.25)
  BOTTOM w0.13: v1(72.35,29.25) J3.19
D5: length 45.2
  TOP w0.13: v1(72.35,28.25) 75.85,24.75 75.85,13 73,10.15 59.79,10.15 U1.9
  BOTTOM w0.13: v1(72.35,28.25) J3.20
D6: length 43.3
  TOP w0.13: v1(72.35,27.25) 75.59,24.01 75.59,13.14 72.9,10.45 60.05,10.45 U1.10
  BOTTOM w0.13: v1(72.35,27.25) J3.21
D7: length 41.4
  TOP w0.13: v1(72.35,26.25) 75.33,23.27 75.33,13.28 72.8,10.75 60.32,10.75 U1.11
  BOTTOM w0.13: v1(72.35,26.25) J3.22
D10: length 39.6
  TOP w0.13: U1.12 60.58,11.05 72.7,11.05 75.07,13.42 75.07,22.53 v1(72.35,25.25)
  BOTTOM w0.13: v1(72.35,25.25) J3.23
D11: length 37.7
  TOP w0.13: v1(72.35,24.25) 74.81,21.79 74.81,13.53 72.63,11.35 60.85,11.35 U1.13
  BOTTOM w0.13: v1(72.35,24.25) J3.24
D12: length 35.9
  TOP w0.13: v1(72.35,23.25) 74.55,21.05 74.55,13.65 72.55,11.65 61.11,11.65 U1.14
  BOTTOM w0.13: v1(72.35,23.25) J3.25
D13: length 33
  TOP w0.13: 55.22,18.11 61.38,11.95 72.48,11.95 74.29,13.76 74.29,19.31 v1(72.35,21.25)
  BOTTOM w0.13: v1(72.35,21.25) J3.27
D14: length 31.2
  TOP w0.13: U1.16 61.65,12.25 72.4,12.25 74.03,13.88 74.03,18.57 v1(72.35,20.25)
  BOTTOM w0.13: v1(72.35,20.25) J3.28
D15: length 29.3
  TOP w0.13: U1.17 61.91,12.55 72.3,12.55 73.77,14.02 73.77,17.83 v1(72.35,19.25)
  BOTTOM w0.13: v1(72.35,19.25) J3.29
D19: length 27.3
  TOP w0.13: v1(72.35,18.25) 73.51,17.09 73.51,14.13 72.23,12.85 63.4,12.85 57.43,18.82 56.89,18.82 56.46,19.24 U1.19
  BOTTOM w0.13: v1(72.35,18.25) J3.30
D20: length 25.2
  TOP w0.13: U1.21 63.46,13.26 72.28,13.26 73.25,14.24 73.25,16.35 v1(72.35,17.25)
  BOTTOM w0.13: v1(72.35,17.25) J3.31
D21: length 23.9
  TOP w0.13: v1(72.35,16.25) 72.99,15.61 72.99,14.34 72.2,13.55 65.15,13.55 U1.23
  BOTTOM w0.13: v1(72.35,16.25) J3.32
D22: length 22.7
  TOP w0.13: U1.24 57.47,22.35 57.59,22.35 57.9,22.35 66.4,13.85 71.85,13.85 72.4,14.4 v1(72.4,15.25)
  BOTTOM w0.13: v1(72.4,15.25) J3.33
D23: length 17.3
  TOP w0.13: v1(67.33,14.47) 67.1,14.25 66.45,14.25 58.01,22.69 57.25,22.69 U1.25
  BOTTOM w0.13: J3.34 69.78,14.47 v1(67.33,14.47)
DE: length 19.9
  TOP w0.13: U1.27 56.76,23.33 58.68,23.33 67.15,31.8 67.15,33.73 v1(67.66,34.24)
  BOTTOM w0.13: J3.14 69.99,34.24 v1(67.66,34.24)
HSYNC: length 28.3
  TOP w0.13: v1(72.35,32.25) 72.35,34.85 71.8,35.4 67.9,35.4 66.89,34.39 66.89,31.94 58.54,23.59 56.46,23.59 U1.28
  BOTTOM w0.13: v1(72.35,32.25) J3.16
LCD_CLK: length 18.9
  TOP w0.13: U1.26 57.07,23.07 58.79,23.07 67.65,31.93 v1(67.65,33.25)
  BOTTOM w0.13: v1(67.65,33.25) J3.15
LED-: length 14
  TOP w0.13: v1(72.5,4.05) 79.65,4.05 79.75,3.95 Q1.3
  BOTTOM w0.13: J3.40 J3.41 J3.42 J3.43 J3.44 70.2,4.05 v1(72.5,4.05)
LRADC: length 24.8
  TOP w0.13: R18.1 34.95,2.8 SW2.4 35.15,2.7 v1(35.15,3.5) ; C6.1 41.99,9.6 41.9,9.6 41.67,9.37 v1(40.37,9.37) 40.95,9.95 40.95,11.65 43.55,14.25 44.85,14.25 U1.79
  BOTTOM w0.13: v1(35.15,3.5) 35.15,4.15 v1(40.37,9.37)
NRESET: length 23.7
  TOP w0.13: C35.1 65.45,8.3 R37.2 v1(61.6,8.4) ; v1(61.6,13.8) 61.25,14.15 61.2,14.15 R38.1
  BOTTOM w0.13: v1(61.6,8.4) v1(61.6,13.8) 62.15,13.25 J3.35
OSCI: length 8.7
  TOP w0.13: R1.1 46.49,30.61 C1.2 ; R1.1 45.84,30.61 Y1.1 ; R1.1 47.59,29.36 47.59,26.31 U1.51
OSCO: length 5.6
  TOP w0.13: 47.86,25.47 46.38,26.95 43.15,26.95 42.99,27.11 42.9,27.11
PD12: length 2
  TOP w0.13: U1.18 57.23,17.8 R38.2
RESET: length 10.6
  TOP w0.13: C3.1 39.19,12.54 39.05,12.54 38.9,12.69 38.9,13.51 44.64,19.24 U1.70
RTC_INT: length 13.1
  TOP w0.13: U1.39 53.23,26.59 53.23,27.48 51.43,29.28 51.43,30.13 51.95,30.66 51.95,31 51.65,31.3 51.65,31.8 v1(52.65,32.8) ; U3.3 52.68,36.77 v1(53.35,36.1)
  BOTTOM w0.13: v1(53.35,36.1) 53.35,33.5 v1(52.65,32.8)
RTC_OSCI: length 4.4
  TOP w0.13: U3.1 54.43,38.57 52.86,40.14 Y2.2 53.38,40.93 C4.2
RTC_OSCO: length 5.9
  TOP w0.13: U3.2 52.3,38.9 51.35,38.9 Y2.1 49.08,38.16 C5.2
SDC0_CLK: length 39.6
  TOP w0.13: U1.56 46.73,24.37 46.15,24.95 43,24.95 40.35,22.3 39.4,22.3 35.5,26.2 v1(19.35,26.2) ; J6.5 v1(19.35,20.8)
  BOTTOM w0.13: v1(19.35,20.8) v1(19.35,26.2)
SDC0_CMD: length 43.2
  TOP w0.13: v1(20,26.75) 36.79,26.75 39.24,24.3 R23.2 40,22.65 40.3,22.65 42.9,25.25 46.38,25.25 U1.55 ; J6.3 v1(20,18.6)
  BOTTOM w0.13: v1(20,18.6) v1(20,26.75)
SDC0_D0: length 36.7
  TOP w0.13: v1(18.65,25.6) 34.25,25.6 37.66,22.19 38.14,22.19 38.3,22.34 38.3,22.45 38.82,21.93 40.35,21.93 43.11,24.69 45.81,24.69 U1.57 ; J6.7 v1(18.65,23)
  BOTTOM w0.13: v1(18.65,23) v1(18.65,25.6)
SDC0_D1: length 34.2
  TOP w0.13: U1.58 45.51,24.43 43.23,24.43 39.7,20.9 38.05,20.9 37.39,21.55 37.39,21.34 37.1,21.05 36.9,21.05 33.85,24.1 J6.8
SDC0_D2: length 46
  TOP w0.13: v1(21.45,27.8) 39.45,27.8 41.09,26.16 41.09,25.25 41.18,25.17 41.98,25.17 42.06,25.25 42.14,25.25 43.26,26.38 46.39,26.38 U1.53 ; J6.1 v1(21.45,16.4)
  BOTTOM w0.13: v1(21.45,16.4) v1(21.45,27.8)
SDC0_D3: length 44.9
  TOP w0.13: J6.2 v1(20.7,17.5) ; v1(20.7,27.25) 38.14,27.25 40.15,25.25 R22.2 40.67,23.78 41.03,23.78 43.25,26 46.2,26 U1.54
  BOTTOM w0.13: v1(20.7,17.5) v1(20.7,27.25)
SF_CLK: length 19.6
  TOP w0.13: v1(42.9,20.85) 42.45,20.85 39.65,18.05 38.5,18.05 34.76,14.31 34.76,13.59 U2.6 ; v1(41.65,22.1) 43.6,24.05 45.32,24.05 45.88,23.49
  BOTTOM w0.13: v1(41.65,22.1) v1(42.9,20.85)
SF_CS: length 21.1
  TOP w0.13: R13.1 36.45,20.59 36.1,20.25 31.71,20.25 U2.1 32.5,19.44 39.79,19.44 44.1,23.75 44.94,23.75 45.49,23.2 U1.60
SF_MISO: length 17
  TOP w0.13: U1.61 44.76,23.48 44.23,23.48 39.55,18.8 31.25,18.8 30.81,19.24 U2.2
SF_MOSI: length 17.4
  TOP w0.13: U1.62 44.47,23.2 44.34,23.2 44.17,23.03 44.17,23.02 39.6,18.45 38.53,18.45 33.87,13.78 33.87,12.69 U2.5
SVREF: length 10.3
  TOP w0.13: U1.33 54.93,24.9 54.93,25.08 58.68,28.83 ; R35.2 60.01,27.5 C33.1 58.68,28.83 ; 58.68,28.83 C29.2 57.36,30.16 R32.1
TE: length 3.9
  BOTTOM w0.13: J3.11 v2(73.9,37.25)
TWI0_SCK: length 11.5
  TOP w0.13: U1.38 52.95,25.85 53.5,26.4 53.5,27.58 52.38,28.7 52.38,29.18 52.91,29.7 52.91,29.75 52.55,30.1 52.55,30.3 55.51,33.26 56.14,33.26 U3.6
TWI0_SDA: length 8.7
  TOP w0.13: 53.86,28.75 53.5,28.4 53.5,27.95 53.75,27.7 ; 53.24,25.47 53.85,26.08 53.85,27.6 53.75,27.7 ; 53.75,27.7 56.05,30 56.05,31.56 U3.5
UART0_RX: length 16.2
  TOP w0.13: U1.49 48.19,26.84 48.19,28.44 49.25,29.5 49.25,32.92 47.36,34.81 44.7,34.81 42.96,36.55 42.96,36.7 J5.2
UART0_TX: length 13.7
  TOP w0.13: J5.1 45.25,37.4 49.55,33.1 49.55,29.4 48.45,28.3 48.45,27.15 48.99,26.61 U1.48
USB_DET: length 53.1
  TOP w0.13: U1.46 49,27.72 49,28.05 50.15,29.2 50.15,34.95 37.5,47.6 19.45,47.6 16.65,44.8 R10.2
USB_DM: length 67.7
  TOP w0.13: U1.68 43.63,19.25 43.63,19.08 35.15,10.6 13.2,10.6 12.71,11.09 J4.2
USB_DP: length 68.9
  TOP w0.13: U1.69 39.4,14.46 39.4,14.4 35,10 13.15,10 12.07,11.09 J4.3
USB_ID: length 70.5
  TOP w0.13: 47.75,36.95 49.85,34.85 49.85,29.3 48.72,28.17 48.72,27.44 U1.47 ; 47.75,36.95 45.45,39.25 39.23,39.25 37.95,37.97 37.95,33.5 33.62,29.16 v1(13.3,29.16) ; 47.75,36.95 47.35,36.55 R9.1 ; J4.4 v1(11.41,29.16)
  BOTTOM w0.13: v1(11.41,29.16) v1(13.3,29.16)
VRA1: length 5.8
  TOP w0.13: C30.1 45.48,11.33 45.48,13.75 47.86,16.13
VRA2: length 6
  TOP w0.13: C31.1 46.82,10.87 46.82,13.93 46.81,13.94 U1.83
N101915: length 8.1
  TOP w0.13: U4.2 30.35,42.24 30.61,42.5 C8.1 34.7,43.75 R26.1 34.9,43.95 34.9,45.1 R27.1
N101919: length 8.6
  TOP w0.13: R28.1 24.9,45.05 24.9,43.9 R31.2 25.1,43.7 C11.2 29.74,42.45 29.95,42.24 U4.3
N101966: length 6.7
  TOP w0.13: R29.2 30.15,31.3 30.15,32.45 R30.2 29.95,32.65 C10.2 30.35,34.3 U4.14
N131139: length 2.9
  TOP w0.13: U4.6 26.4,40.35 25.9,39.85 L3.2
N132697: length 2.6
  TOP w0.13: L1.2 33.9,39.5 33.05,40.35 U4.20
N136168: length 2
  TOP w0.13: L2.1 U4.11
N235998: length 9
  TOP w0.13: R18.2 31.75,3.45 31.45,3.75 26.71,3.75 26.45,3.49 SW3.4 26.35,2.75 R19.1
N236006: length 9
  TOP w0.13: R20.1 17.75,2.75 SW4.4 17.85,3.49 18.01,3.65 22.95,3.65 23.15,3.45 R19.2
N236014: length 6.6
  TOP w0.13: R20.2 14.5,3.4 14.3,3.6 9.8,3.6 9.2,3 SW5.4
N256100: length 12.6
  TOP w0.13: C2.2 41.08,27.27 41.91,28.09 41.33,28.67 41.33,29.77 Y1.3 40.9,31.33 40.9,32.85 41.75,33.7 43.25,33.7 R1.2
N15766837: length 2.6
  TOP w0.13: R11.2 R10.1 R12.1
N15767318: length 1.7
  TOP w0.13: R7.2 77.3,3.35 77.66,2.98 Q1.2

## Copper pours and planes (outline as drawn; the poured copper is in the pictures)
GND on TOP: 0.15,0.15 0.15,49.35 88.6,49.35 88.6,0.15 ; 47 cut-outs
GND on BOTTOM: 0.15,0.15 0.15,49.35 88.6,49.35 88.6,0.15
